# Altium PCB M3406-Match.PcbDoc
Units mm, origin at the board's own origin, x right, y up, seen from the top; angles counter-clockwise.
Board outline 50 x 34 mm, 2 copper layers (Top Layer, Bottom Layer); 5 components, 3 nets, 12 pads, 0 vias.
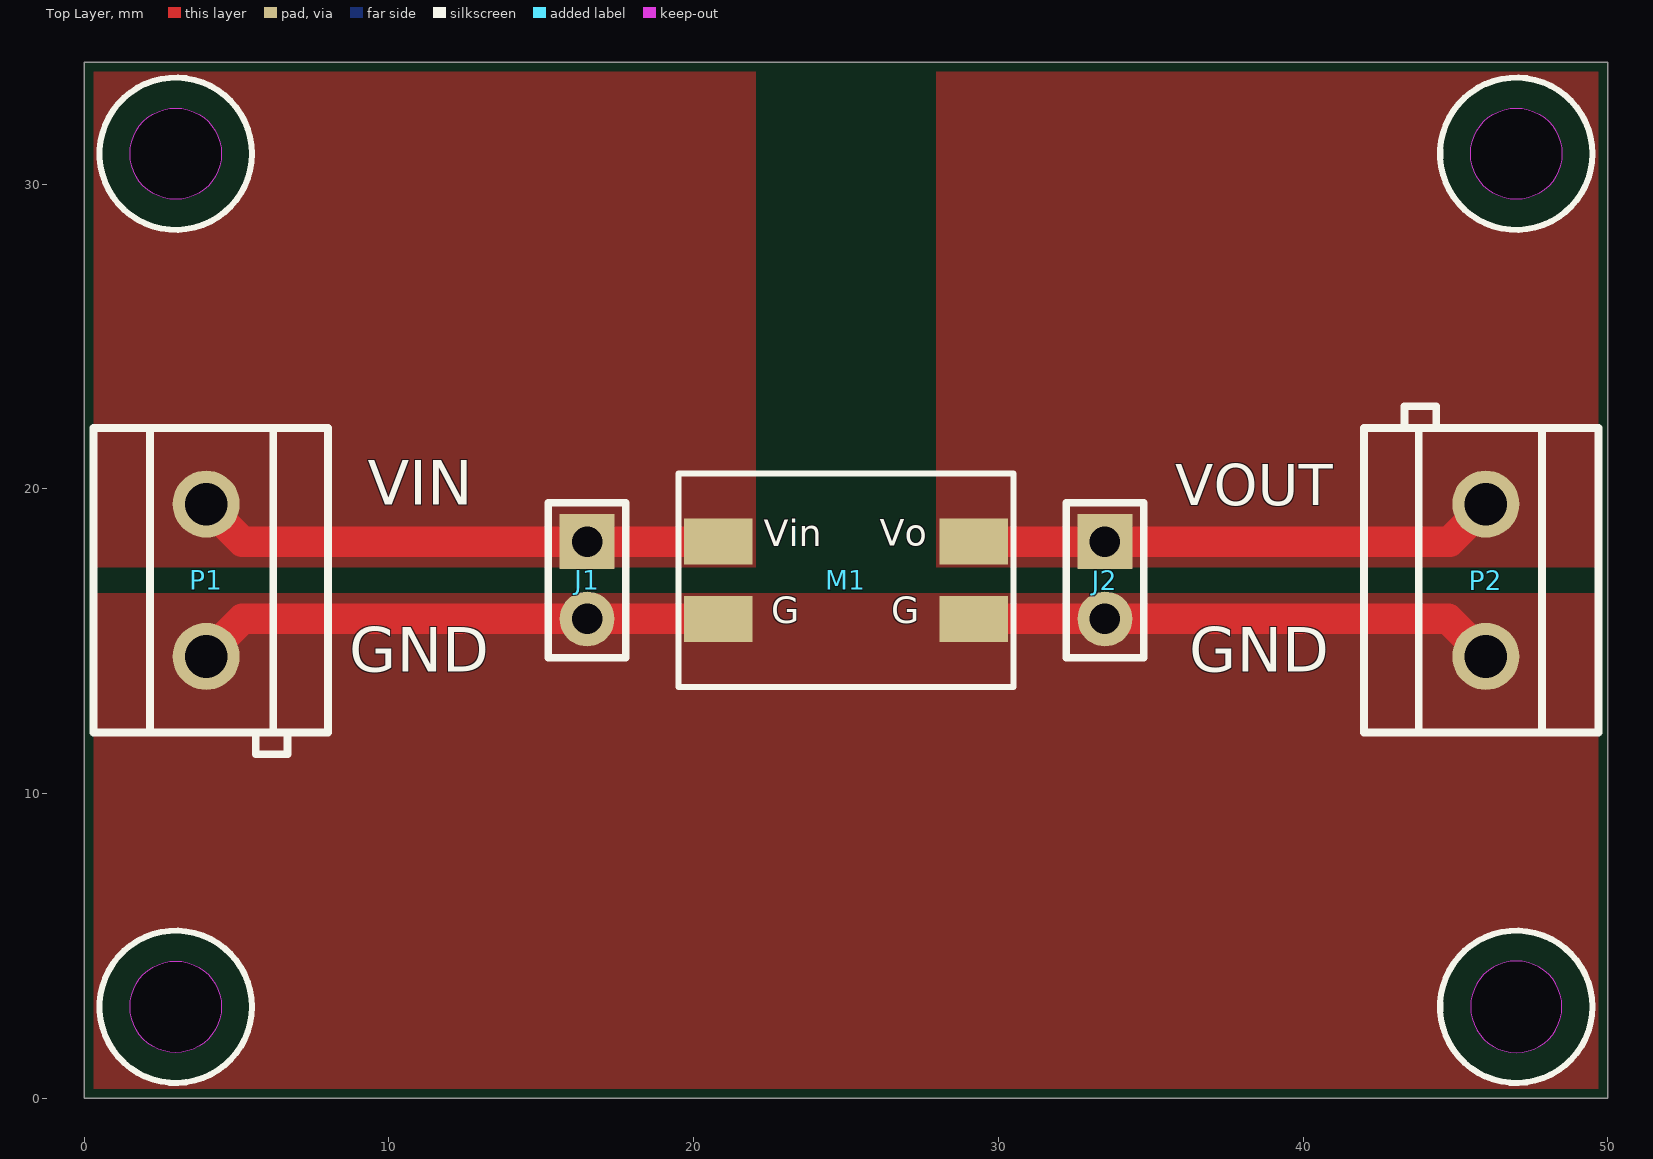
[diagram p0: Top Layer view]
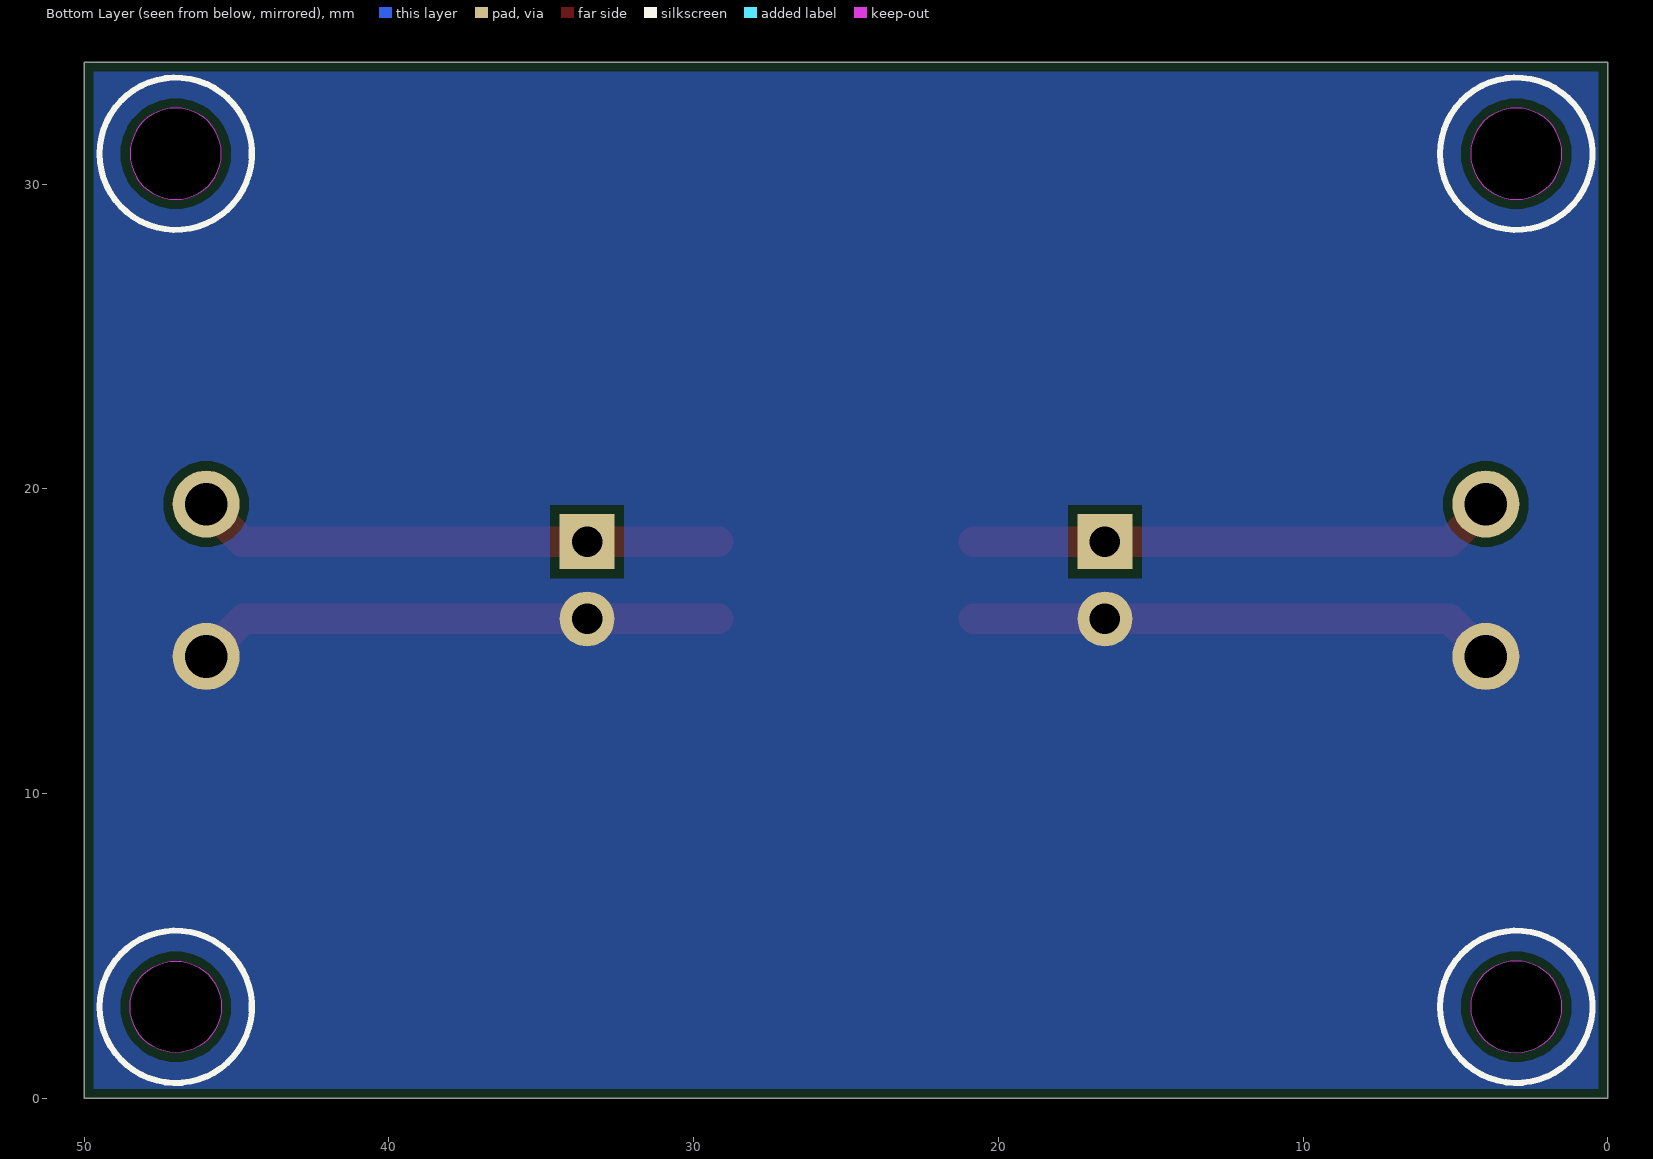
[diagram p1: Bottom Layer view, seen from below]
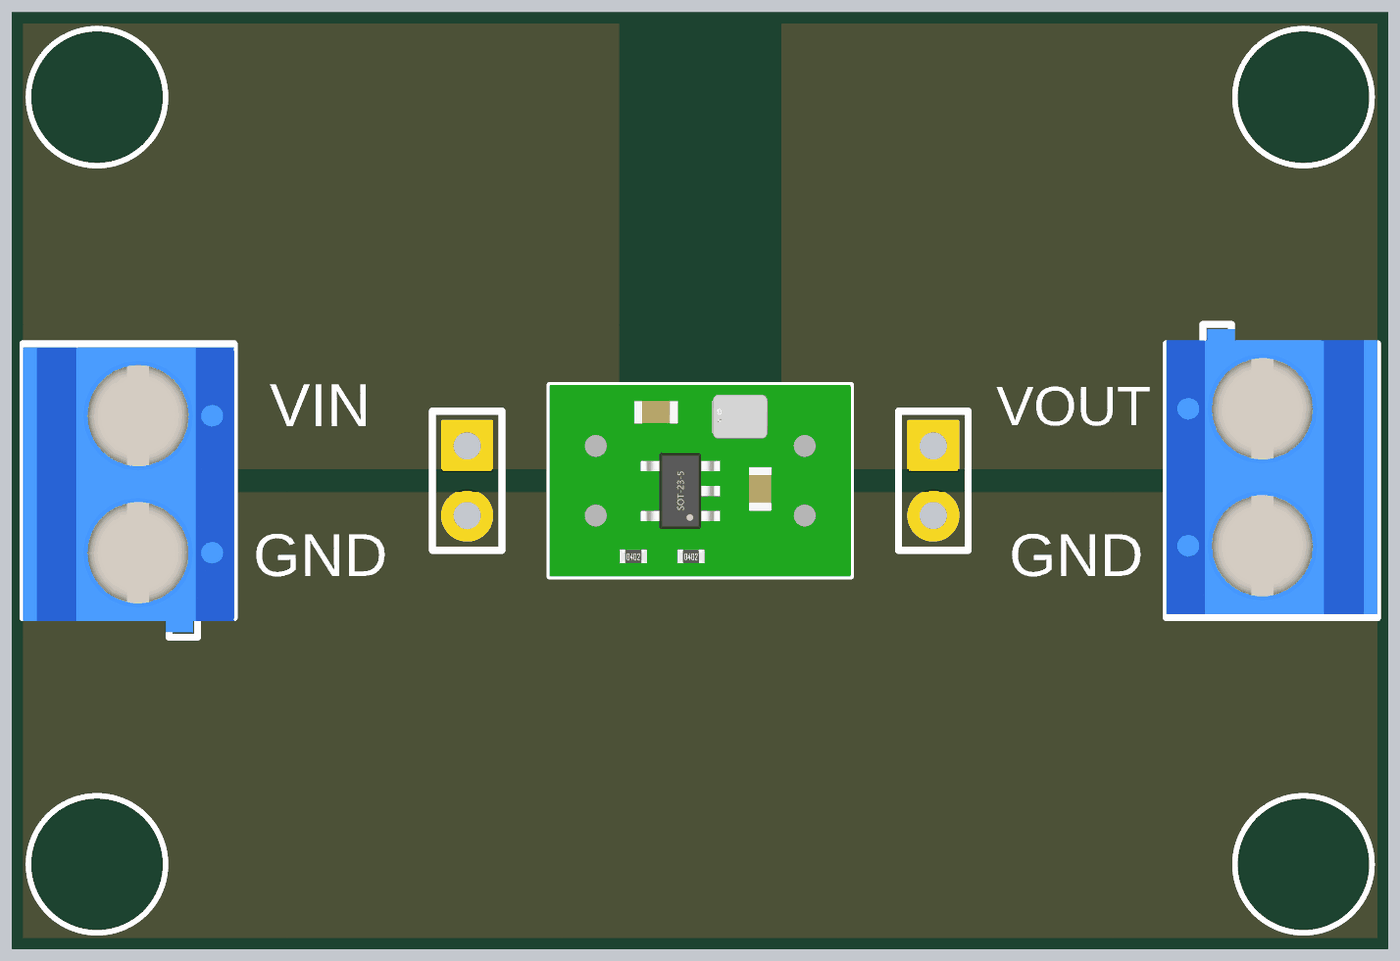
[diagram p2: 3D render of the assembled board from above, using the file's embedded part models]

## Layer stack, top to bottom
Top Solder: solder mask 0.0102, Solder Resist, Dk 3.5
Top Layer: signal copper 0.0356
Dielectric 1: dielectric 0.32, FR-4, Dk 4.8
Bottom Layer: signal copper 0.0356
Bottom Solder: solder mask 0.0102, Solder Resist, Dk 3.5

## Board outline
0,0 50,0 50,34 0,34
cut-out: 47,29.5 cw(c47,31) 45.5,31 cw(c47,31) 47,32.5 cw(c47,31) 48.5,31 cw(c47,31)
cut-out: 3,29.5 cw(c3,31) 1.5,31 cw(c3,31) 3,32.5 cw(c3,31) 4.5,31 cw(c3,31)
cut-out: 3,1.5 cw(c3,3) 1.5,3 cw(c3,3) 3,4.5 cw(c3,3) 4.5,3 cw(c3,3)
cut-out: 45.5,3 ccw(c47,3) 47,1.5 ccw(c47,3) 48.5,3 ccw(c47,3) 47,4.5 ccw(c47,3)

## Design rules (kind name [scope] priority, off if disabled: settings)
BoardOutlineClearance BoardOutlineClearance_1 [OnLayer('GND','PWR','Top Overlay')] p1: gap=0.3 ignorepadtopadclearanceinfootprint=FALSE except(0: Track-OutlineEdge; 0.5: Poly-OutlineEdge)
BoardOutlineClearance [All] p2: gap=0.3 ignorepadtopadclearanceinfootprint=FALSE
Clearance Clearance_2 [OnLayer('GND') vs IsKeepOut] p1: gap=0.3 ignorepadtopadclearanceinfootprint=TRUE except(0: Arc-Fill Arc-Poly Arc-Region Arc-Hole Track-Fill Track-Poly Track-Region Track-Hole SMDPad-Hole THPad-Hole Via-Hole Fill-Hole Poly-Hole Region-Hole Text-Hole; 0.15: Arc-Arc Arc-Track Arc-SMDPad Arc-THPad Arc-Via Arc-Text Track-Track Track-SMDPad Track-THPad Track-Via Track-Text SMDPad-Fill SMDPad-Poly SMDPad-Region)
Clearance Clearance_1 [InNamedPolygon('GND_L01_P006') or OnLayer('PWR') or InComponent('U601')] p2: gap=0.3 ignorepadtopadclearanceinfootprint=TRUE except(0.2: Arc-SMDPad Track-SMDPad SMDPad-Fill SMDPad-Poly SMDPad-Region)
Clearance [All] p3: gap=0.15 ignorepadtopadclearanceinfootprint=TRUE except(0: Arc-Hole Track-Hole SMDPad-Hole THPad-Hole Via-Hole Fill-Hole Poly-Hole Region-Hole Text-Hole; 0.3: SMDPad-Poly THPad-THPad THPad-Via THPad-Fill THPad-Poly THPad-Region THPad-Text Via-Via Via-Fill Via-Poly Via-Region Via-Text Fill-Fill Fill-Poly Fill-Region Fill-Text Poly-Poly Poly-Region Poly-Text Region-Region Region-Text Text-Text)
DiffPairsRouting [All] p1: maxlimit=0.5 minlimit=0.15 mostfreqgap=0.15 toplayer_minwidth=0.1 toplayer_maxwidth=0.5 toplayer_prefwidth=0.15 bottomlayer_minwidth=0.1 bottomlayer_maxwidth=0.5 bottomlayer_prefwidth=0.15 maxuncoupledlength=15
MinimumSolderMaskSliver [All] p1: minsoldermaskwidth=0.05
PolygonConnect [All] p1: connectstyle=Direct reliefconductorwidth=0.3 reliefentries=4 polygonreliefangle="45 Angle" airgapwidth=0.3
RoutingVias [All] p1: holewidth=0.3 width=0.5 viastyle="Through Hole" minholewidth=0.2 minwidth=0.4 maxholewidth=0.8 maxwidth=1
SilkToSilkClearance [All] p1: silktosilkclearance=0
SilkToSolderMaskClearance [IsPad] p1: minsilkscreentomaskgap=0.05 clearancetoexposedcopper=TRUE
SolderMaskExpansion [All] p1: expansion=0.102 istentingtop=FALSE
Width [All] p1: maxlimit=1 minlimit=0.15 preferedwidth=0.3
26 further rules are at their usual default settings.

## Components (designator, comment, footprint, x,y, rotation, side; value= is the part's Value field where it differs from the comment)
J1 "Header_2" HDR-TH_2P-P2.54-V-M-1 16.5,17 r270 top
J2 "Header_2" HDR-TH_2P-P2.54-V-M-1 33.5,17 r270 top
M1 "M3406-Board_Match" M3406-Board_Match 25,17 r0 top locked
P1 "KF301-5" TH_P5.00_KF301-5.0-2P 4,17 r270 top locked
P2 "KF301-5" TH_P5.00_KF301-5.0-2P 46,17 r90 top

## Footprints (in the part's own frame and the unit in brackets; to place one, negate y for a bottom-side part, rotate by r counter-clockwise, add the part's x,y. Pads: shape width x height; smd on the part's side, far side on the other; paste and mask are expansions set on the pad)
HDR-TH_2P-P2.54-V-M-1 [mm]
  rect 1.8x1.8 hole 1 mask+0.051: 1(-1.27,0)
  round 1.8 hole 1 mask+0.051: 2(1.27,0)
  silkscreen extent -2.54,-1.27 2.54,1.27
M3406-Board_Match [mm]
  rect 2.25x1.5 smd: 1(-4.191,1.27) 2(-4.191,-1.27) 3(4.191,1.27) 4(4.191,-1.27)
  silkscreen extent -5.5,-3.5 5.5,3.5, body extent -5.5,-3.5 5.5,3.5, height 2.2
TH_P5.00_KF301-5.0-2P [mm]
  round 2.2 hole 1.4 mask+0.051: 1(-2.5,0) 2(2.5,0)
  silkscreen extent -5,-3.7 5.71,4, body extent -4.87,-3.7 5.53,4, height 9.98

## Part data
J1 J2 P1 P2: "直插,P=2.54mm", Mounting Type=直插
  J1 J2: MPN=Header_2
  P1 P2: MPN=KF301-5
M1: "M3406匹配板", MPN=M3406-Board_Match

## Nets (pads, with @x,y where several pads share a name; then routed paths per layer and width w, separated by ;. In a path a pad name is that pad's centre, name@x,y a point inside that pad or via, vN(x,y) a via of type N, cw(c..) or ccw(c..) an arc to the next point about the centre after c; other vN are vias at no path point)
GND: J1.2 J2.2 M1.2 M1.4 P1.2 P2.1 | length 34.7
  Top Layer w1: P1.2 4,14.544 5.186,15.73 M1.2 ; M1.4 J2.2 44.77,15.73 P2.1
NetJ1_1: J1.1 M1.1 P1.1 | length 17.3
  Top Layer w1: P1.1 4,19.456 5.186,18.27 M1.1
NetJ2_1: J2.1 M1.3 P2.2 | length 17.3
  Top Layer w1: M1.3 44.814,18.27 46,19.456 P2.2

## Polygon pours and split planes (outlines as drawn)
GND on Top Layer "GND_L01_P020" (solid, remove dead copper, pour order 20): 50,16.575 50,0 0,0 0,16.575
NetJ1_1 on Top Layer "NETJ1_1_L01_P019" (solid, remove dead copper, pour order 19): 22.034,17.425 22.034,33.993 22.027,34 0,34 0,17.425
NetJ2_1 on Top Layer "NETJ2_1_L01_P018" (solid, remove dead copper, pour order 18): 27.966,17.425 27.966,33.993 27.973,34 50,34 50,17.425
GND on Bottom Layer "GND_L02_P015" (solid, remove dead copper, pour order 15): 0,34 50,34 50,0 0,0 0,34

## Other copper
Top Layer:
  pour cut-out: 47,28.5 cw(c47,31) 44.5,31 cw(c47,31) 47,33.5 cw(c47,31) 49.5,31 cw(c47,31)
  pour cut-out: 3,28.5 cw(c3,31) 0.5,31 cw(c3,31) 3,33.5 cw(c3,31) 5.5,31 cw(c3,31)
  pour cut-out: 44.5,3 ccw(c47,3) 47,0.5 ccw(c47,3) 49.5,3 ccw(c47,3) 47,5.5 ccw(c47,3)
  pour cut-out: 3,0.5 cw(c3,3) 0.5,3 cw(c3,3) 3,5.5 cw(c3,3) 5.5,3 cw(c3,3)

## Silkscreen, mask and mechanical layers (free items; w line width, h text height)
Top Overlay:
  circle w0.2: c47,3 r2.5
  circle w0.2: c3,3 r2.5
  circle w0.2: c47,31 r2.5
  circle w0.2: c3,31 r2.5
  text "VOUT" at 35.802,19.026 h2.3
  text "VIN" at 9.299,19 h2.5
  text "GND" at 8.7,13.528 h2.5
  text "GND" at 36.267,13.528 h2.5
Bottom Overlay:
  circle w0.2: c47,3 r2.5
  circle w0.2: c3,3 r2.5
  circle w0.2: c47,31 r2.5
  circle w0.2: c3,31 r2.5
Top Solder:
  rectangle: 27.966,14.98 30.316,16.48
  rectangle: 27.966,17.52 30.316,19.02
  rectangle: 19.684,14.98 22.034,16.48
  rectangle: 19.684,17.52 22.034,19.02
Mechanical 1:
  circle w0.2: c47,3 r1.5
  circle w0.2: c47,31 r1.5
  circle w0.2: c3,31 r1.5
  circle w0.2: c3,3 r1.5
  lines w0.2: 0,0 50,0 50,34 0,34 0,0

## Text inside footprints (layer, text, board x,y; h text height)
M1: Top Overlay "Vin" at 22.295,17.818 h1.5; Top Overlay "Vo" at 26.105,17.833 h1.5; Top Overlay "G" at 26.485,15.295 h1.5; Top Overlay "G" at 22.548,15.295 h1.5